# EAGLE board open-bldc-power-teardrops (EAGLE 5.06)
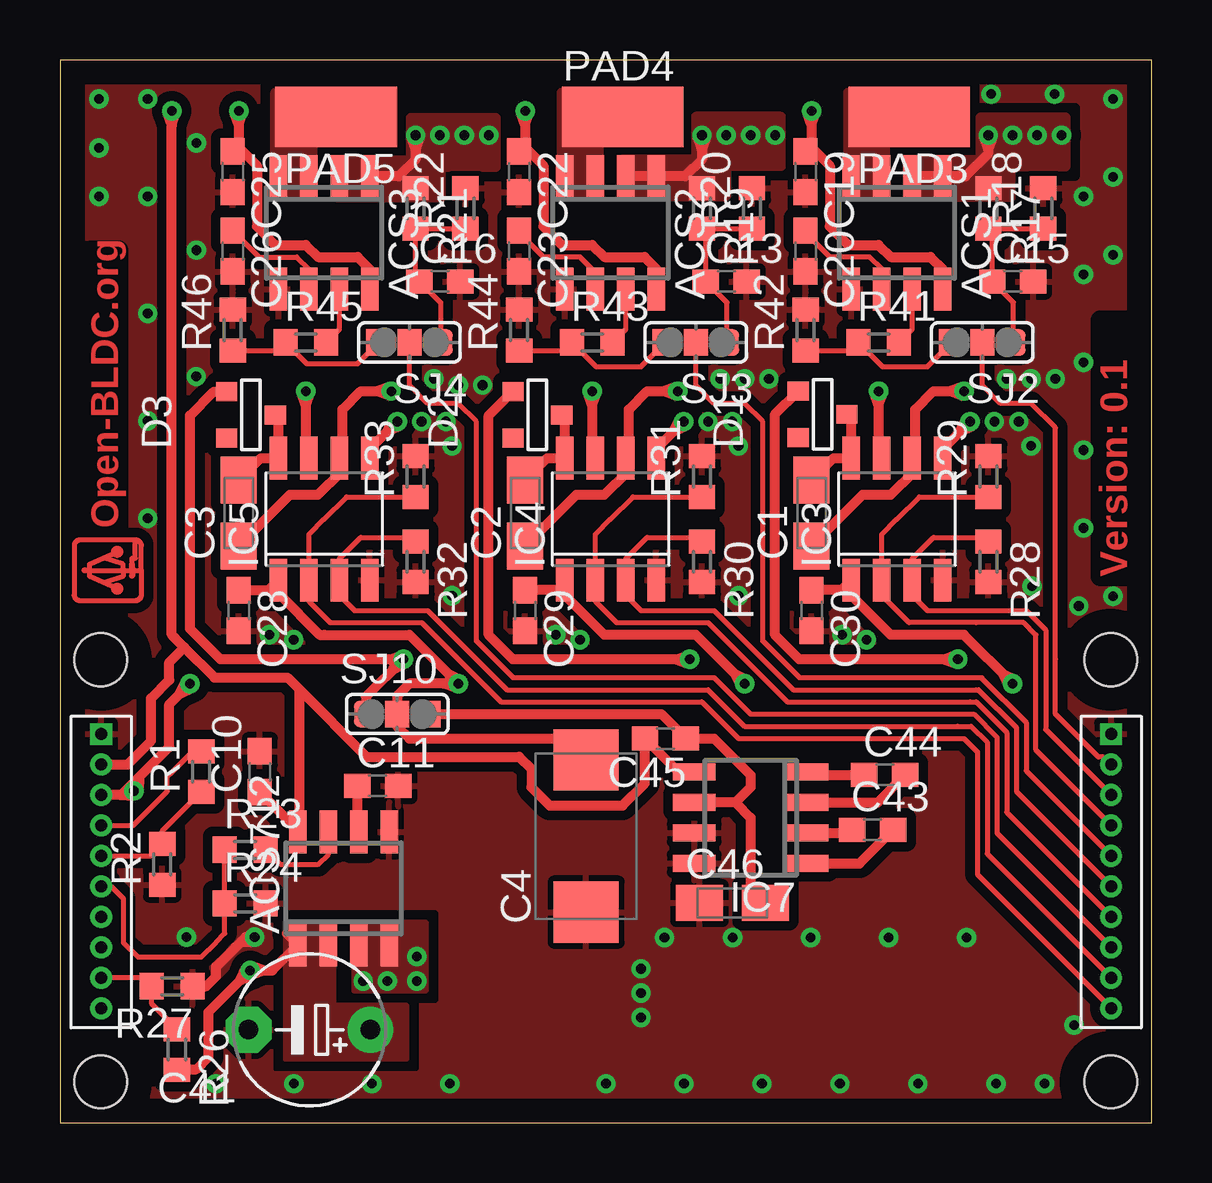
[diagram p0: board, top side]
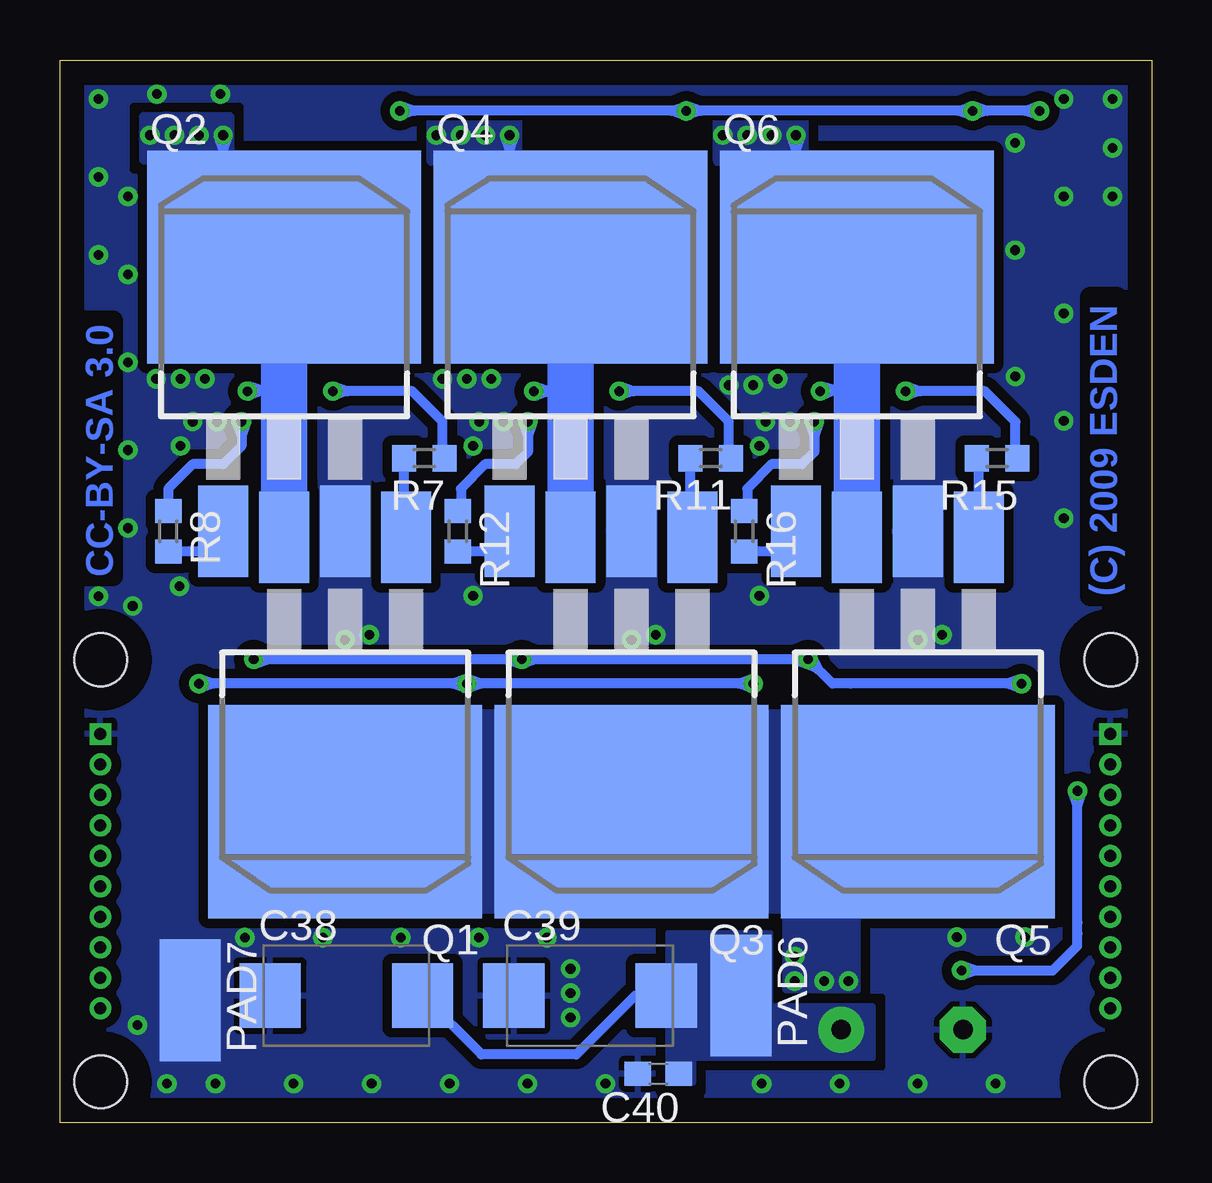
[diagram p1: board, bottom side, seen from below]

Size 45.5 x 44.3 mm. Coordinates in mm from the lower left corner, seen from the top.
Outline: 45.5,0 45.5,44.3 0,44.3 0,0 45.5,0
Copper layers (1*16): Top 0.035mm / dielectric 1.5mm / Bottom 0.035mm
Design rules "open-bldc *": minimum track width 8mil, minimum drill 0.4mm, track to track 8mil, track to pad 8mil, pad to pad 8mil, via to via 8mil, smd to smd 8mil, copper to edge 40mil, drill to drill 8mil, minimum pad ring 8mil, minimum via ring 8mil, stop-mask expansion 4mil, vias tented up to drill 0.4mm, thermal gap 10mil
Net classes: 0 default: width 0.152 mm, drill 0.305 mm, clearance 0.152 mm
Holes 2.2 mm at 43.8,1.7 1.7,1.7 1.7,19.3 43.8,19.3

## Footprints (pad centres in the part's own frame; a part is rotated, then mirrored left to right if it is on the bottom)
SO8 = smd 0.72 x 1.78: 1 -1.905,-2.35; 2 -0.635,-2.35; 3 0.635,-2.35; 4 1.905,-2.35; 5 1.905,2.35; 6 0.635,2.35; 7 -0.635,2.35; 8 -1.905,2.35
A/3216-18R = smd 1.95 x 1.5: + 1.375,0; - -1.375,0
D/7343-31R = smd 2.55 x 2.7: + 3.175,0; - -3.175,0
C0603 = smd 1.1 x 1: 1 -0.85,0; 2 0.85,0
E5-6 = drill 0.813 pad 1.905 round: + -2.54,0 | drill 0.813 pad 1.905 octagon: - 2.54,0
SOT-23 = smd 0.787 x 0.889: 1 0.025,-1.016; 2 -0.94,1.016; 3 0.991,1.016
SO-8 = smd 0.72 x 1.78: 1 -1.905,-2.543; 2 -0.635,-2.543; 3 0.635,-2.543; 4 1.905,-2.543; 5 1.905,2.543; 6 0.635,2.543; 7 -0.635,2.543; 8 -1.905,2.543
PIN_HDR_1.27MM_10 = drill 0.5 square: P$1 0,0 | drill 0.5 round: P$2 0,1.27; P$3 0,2.54; P$4 0,3.81; P$5 0,5.08; P$6 0,6.35; P$7 0,7.62; P$8 0,8.89; P$9 0,10.16; P$10 0,11.43
SMD2,54-5,08 = smd 2.54 x 5.08: 1 0,0
D2PACK = smd 2.083 x 3.81: 1 -2.54,-8.89; 3 2.54,-8.89 | smd 11.43 x 8.89: 2 0,2.54
R0603 = smd 1 x 1.1: 1 -0.85,0; 2 0.85,0
SJ2S = smd 1 x 1.1: 1 -1.3,0; 2 0,0; 3 1.3,0

## Placement (x,y rotation side)
ACS1  ACS712  [SO8]  34.89,37.1 180 top
ACS2  ACS712  [SO8]  22.95,37.1 180 top
ACS3  ACS712  [SO8]  11.01,37.1 180 top
ACS712  ACS712  [SO8]  11.82,9.77 0 top
C1  10µ  [A/3216-18R]  31.33,25.42 90 top
C2  10µ  [A/3216-18R]  19.39,25.42 90 top
C3  10µ  [A/3216-18R]  7.45,25.42 90 top
C4  100µ  [D/7343-31R]  21.93,11.95 90 top
C10  100n  [C0603]  8.33,14.63 90 top
C11  1n  [C0603]  13.25,14.04 0 top
C13  1n  [C0603]  27.77,35.07 0 top
C15  1n  [C0603]  39.71,35.07 0 top
C16  1n  [C0603]  15.84,35.07 0 top
C19  100n  [C0603]  31.08,39.64 270 top
C20  1n  [C0603]  31.08,36.34 270 top
C22  100n  [C0603]  19.14,39.64 270 top
C23  1n  [C0603]  19.14,36.34 270 top
C25  100n  [C0603]  7.2,39.64 270 top
C26  1n  [C0603]  7.2,36.34 270 top
C28  100n  [C0603]  7.45,21.35 270 top
C29  100n  [C0603]  19.39,21.35 270 top
C30  100n  [C0603]  31.33,21.35 270 top
C38  100µ  [D/7343-31R]  33.57,5.3 0 bottom
C39  100µ  [D/7343-31R]  23.41,5.3 0 bottom
C40  100n  [C0603]  20.56,2.05 180 bottom
C41  optional  [E5-6]  10.4,3.88 180 top
C43  22n  [C0603]  33.87,12.21 0 top
C44  22n  [C0603]  34.38,14.49 0 top
C45  22n  [C0603]  25.23,16.02 180 top
C46  4µ7  [A/3216-18R]  28.03,9.16 0 top
D1  BAS21  [SOT-23]  31.79,29.5 90 top
D2  BAS21  [SOT-23]  19.9,29.48 90 top
D3  BAS21  [SOT-23]  7.96,29.48 90 top
IC3  IR2101  [SO-8]  34.89,25.16 0 top
IC4  IR2101  [SO-8]  22.95,25.16 0 top
IC5  IR2101  [SO-8]  11.01,25.16 0 top
IC7  ST662A  [SO8]  28.79,12.72 90 top
JP21  PIN_HDR_1.27MM_10  [PIN_HDR_1.27MM_10]  43.82,16.2 180 top
JP22  PIN_HDR_1.27MM_10  [PIN_HDR_1.27MM_10]  1.72,16.2 180 top
PAD3  PHASE_A  [SMD2,54-5,08]  35.39,41.93 90 top
PAD4  PHASE_B  [SMD2,54-5,08]  23.46,41.93 270 top
PAD5  PHASE_C  [SMD2,54-5,08]  11.52,41.93 90 top
PAD6  BATT+  [SMD2,54-5,08]  17.11,5.3 180 bottom
PAD7  BATT-  [SMD2,54-5,08]  40.07,5.1 180 bottom
Q1  IRF3704S  [D2PACK]  33.62,15.51 180 bottom
Q2  IRF3704S  [D2PACK]  36.16,33.54 0 bottom
Q3  IRF3704S  [D2PACK]  21.68,15.51 180 bottom
Q4  IRF3704S  [D2PACK]  24.22,33.54 0 bottom
Q5  IRF3704S  [D2PACK]  9.74,15.51 180 bottom
Q6  IRF3704S  [D2PACK]  12.28,33.54 0 bottom
R1  NP  [R0603]  5.89,14.63 90 top
R2  0  [R0603]  4.27,10.77 90 top
R7  22  [R0603]  30.31,27.7 180 bottom
R8  22  [R0603]  40.98,24.65 270 bottom
R11  22  [R0603]  18.38,27.7 180 bottom
R12  22  [R0603]  28.92,24.65 270 bottom
R15  22  [R0603]  6.44,27.7 180 bottom
R16  R22  [R0603]  16.98,24.65 270 bottom
R17  10k  [R0603]  38.7,38.12 270 top
R18  3k6  [R0603]  40.98,38.12 90 top
R19  10k  [R0603]  26.76,38.12 270 top
R20  3k6  [R0603]  28.84,38.12 90 top
R21  10k  [R0603]  14.82,38.12 270 top
R22  3k6  [R0603]  16.9,38.12 90 top
R23  2k  [R0603]  7.72,11.38 0 top
R24  10k  [R0603]  7.72,9.14 0 top
R26  10k  [R0603]  4.88,3.05 270 top
R27  2k7  [R0603]  4.67,5.69 180 top
R28  10k  [R0603]  38.7,23.38 270 top
R29  10k  [R0603]  38.7,26.94 90 top
R30  10k  [R0603]  26.76,23.38 270 top
R31  10k  [R0603]  26.76,26.94 90 top
R32  10k  [R0603]  14.82,23.38 270 top
R33  10k  [R0603]  14.82,26.94 90 top
R41  2k  [R0603]  34.12,32.53 0 top
R42  10k  [R0603]  31.08,33.04 90 top
R43  2k  [R0603]  22.19,32.53 0 top
R44  10k  [R0603]  19.14,33.04 90 top
R45  2k  [R0603]  10.25,32.53 0 top
R46  10k  [R0603]  7.2,33.04 90 top
SJ2  SJ2S  [SJ2S]  38.44,32.53 180 top
SJ3  SJ2S  [SJ2S]  26.5,32.53 180 top
SJ4  SJ2S  [SJ2S]  14.57,32.53 180 top
SJ10  SJ2S  [SJ2S]  14.06,17.03 0 top

## Library data of the parts
ACS1-ACS3 ACS712 IC3-IC5 IC7 JP21 JP22 SJ2-SJ4 SJ10 = open-bldc
C1-C4 C10 C11 C13 C15 C16 C19 C20 C22 C23 C25 C26 C28-C30 C38-C41 C43-C46 R1 R2 R7 R8 R11 R12 R15-R24 R26-R33 R41-R46 = rcl
D1-D3 = zetex
PAD3-PAD7 = wirepad
Q1-Q6 = my-transistor-power

## Nets
+3V3: JP22.P$4 R1.2
+5V: ACS1.8 ACS2.8 ACS3.8 ACS712.8 C10.1 C19.1 C22.1 C25.1 C45.2 IC7.5 JP22.P$2
+12V: ACS712.1 ACS712.2 C38.+ C39.+ C40.1 C41.+ D1.3 D2.3 D3.3 JP22.P$3 PAD6.1 R26.2 SJ10.1
+12V_I_SENSE: ACS712.3 ACS712.4 Q1.2 Q3.2 Q5.2
BEMF_A: C15.1 R17.2 R18.1 SJ2.1
BEMF_B: C13.1 R19.2 R20.1 SJ3.1
BEMF_C: C16.1 R21.2 R22.1 SJ4.1
CTRL_A+: IC3.2 JP21.P$4 R29.1
CTRL_A-: IC3.3 JP21.P$3 R28.1
CTRL_B+: IC4.2 JP21.P$7 R31.1
CTRL_B-: IC4.3 JP21.P$6 R30.1
CTRL_C+: IC5.2 JP21.P$10 R33.1
CTRL_C-: IC5.3 JP21.P$9 R32.1
GND: ACS1.5 ACS2.5 ACS3.5 ACS712.5 C4.- C10.2 C11.2 C13.2 C15.2 C16.2 C19.2 C20.2 C22.2 C23.2 C25.2 C26.2 C28.2 C29.2 C30.2 C38.- C39.- C40.2 C41.- C46.- IC3.4 IC4.4 IC5.4 IC7.7 IC7.8 JP21.P$1 JP22.P$1 PAD7.1 Q2.3 Q4.3 Q6.3 R2.1 R18.2 R20.2 R22.2 R24.2 R27.1 R28.2 R29.2 R30.2 R31.2 R32.2 R33.2 R42.2 R44.2 R46.2
I/BEMF_A: JP21.P$2 SJ2.2
I/BEMF_B: JP21.P$5 SJ3.2
I/BEMF_C: JP21.P$8 SJ4.2
I_A: R41.1 R42.1 SJ2.3
I_B: R43.1 R44.1 SJ3.3
I_C: R45.1 R46.1 SJ4.3
I_PHASE_A: ACS1.3 ACS1.4 PAD3.1
I_PHASE_B: ACS2.3 ACS2.4 PAD4.1
I_PHASE_C: ACS3.3 ACS3.4 PAD5.1
I_SENSE: JP22.P$6 R23.1 R24.1
MOT_TEMP: JP22.P$8
N$1: IC4.7 R11.1
N$2: IC3.7 R7.1
N$6: ACS712.7 R23.2
N$7: IC3.5 R8.1
N$11: Q1.1 R7.2
N$12: C1.+ D1.1 IC3.8
N$13: IC4.5 R12.1
N$14: Q3.1 R11.2
N$15: Q5.1 R15.2
N$16: C2.+ D2.1 IC4.8
N$17: Q6.1 R16.2
N$18: IC5.7 R15.1
N$19: IC5.5 R16.1
N$21: C3.+ D3.1 IC5.8
N$23: ACS712.6 C11.1
N$24: C43.2 IC7.1
N$27: C44.2 IC7.3
N$29: C43.1 IC7.2
N$30: C44.1 IC7.4
N$31: ACS1.6 C20.1
N$32: ACS1.7 R41.2
N$34: ACS2.6 C23.1
N$35: ACS2.7 R43.2
N$37: ACS3.6 C26.1
N$38: ACS3.7 R45.2
N$43: Q2.1 R8.2
N$44: Q4.1 R12.2
NC: JP22.P$10
PHASE_A: ACS1.1 ACS1.2 C1.- IC3.6 Q1.3 Q2.2 R17.1
PHASE_B: ACS2.1 ACS2.2 C2.- IC4.6 Q3.3 Q4.2 R19.1
PHASE_C: ACS3.1 ACS3.2 C3.- IC5.6 Q5.3 Q6.2 R21.1
PS_ID: JP22.P$5 R1.1 R2.2
TEMP: JP22.P$7
V_BATT: JP22.P$9 R26.1 R27.2
VBD: C4.+ C28.1 C29.1 C30.1 IC3.1 IC4.1 IC5.1 SJ10.2
VBD_PUMP: C45.1 C46.+ IC7.6 SJ10.3

## Tracks (layer width: path | path; a pad name or v marks a point on that pad's centre or on a via)
+3V3
  Top 0.203: JP22.P$4 3.04,12.39 4.47,13.82 4.47,14.43 4.67,14.63 5.52,15.48 R1.2
+5V  (via drill 0.4)
  Top 0.406: ACS2.8 24.85,35.6 24.37,36.08 22.7,36.08 22.19,36.59 20.92,36.59 20.16,37.35 20.16,39.89 19.56,40.49 19.48,40.49 | ACS1.8 36.79,35.58 36.28,36.08 34.63,36.08 34.12,36.59 32.85,36.59 32.09,37.35 32.09,39.89 31.5,40.49 31.42,40.49 | ACS3.8 12.92,35.58 12.41,36.08 10.76,36.08 10.25,36.59 8.98,36.59 8.22,37.35 8.22,39.89 7.62,40.49 | v4.66,42.18 4.66,20.34 4.79,20.21 5.18,19.81 | 5.18,19.81 6.44,18.56 8.17,18.56 9.49,18.56 9.97,18.07 | 9.97,18.07 12.79,15.26 19.14,15.26 19.65,14.75 19.65,13.98 20.41,13.22 23.46,13.22 24.39,14.15 C45.2 25.78,14.62 IC7.5 | 31.42,40.49 C19.1 31.42,40.49 | 19.48,40.49 C22.1 19.48,40.49 | 19.48,40.49 19.39,40.58 v19.39,42.18 | 31.42,40.49 31.33,40.49 v31.33,42.18 | 7.62,40.49 C25.1 | 7.62,40.49 7.46,40.66 v7.46,42.18 | JP22.P$2 2.81,14.93 3.8,15.92 3.8,17.69 4.56,18.46 4.56,19.19 5.18,19.81 | 9.97,18.07 9.97,12.32 9.99,12.3 9.87,12.17 ACS712.8 9.92,12.19 C10.1 | v19.39,42.18 19.58,42.11 19.39,41.58 19.2,42.11 v19.39,42.18 | v7.46,42.18 7.64,42.11 7.46,41.58 7.27,42.11 v7.46,42.18 | v31.33,42.18 31.52,42.11 31.33,41.58 31.14,42.11 v31.33,42.18 | v4.66,42.18 4.85,42.11 4.66,41.58 4.47,42.11 v4.66,42.18
  Bottom 0.406: v7.46,42.18 v19.39,42.18 | v19.39,42.18 v31.33,42.18 | v4.66,42.18 v7.46,42.18 | v19.39,42.18 19.33,41.99 18.79,42.18 19.33,42.37 v19.39,42.18 | v19.39,42.18 19.46,42.37 19.99,42.18 19.46,41.99 v19.39,42.18 | v7.46,42.18 7.52,42.37 8.05,42.18 7.52,41.99 v7.46,42.18 | v7.46,42.18 7.39,41.99 6.86,42.18 7.39,42.37 v7.46,42.18 | v31.33,42.18 31.26,41.99 30.73,42.18 31.26,42.37 v31.33,42.18 | v4.66,42.18 4.73,42.37 5.26,42.18 4.73,41.99 v4.66,42.18
+12V  (via drill 0.4)
  Top 0.406: D1.3 29.81,29.53 29.81,20.34 30.82,19.32 v37.43,19.32 | v26.25,19.32 18.89,19.32 17.87,20.34 17.87,29.48 18.86,30.47 D2.3 | v14.31,19.32 6.69,19.32 5.42,20.59 5.42,29.48 6.41,30.47 D3.3 6.92,30.47 | SJ10.1 12.76,17.77 v14.31,19.32 | 2.56,13.66 JP22.P$3 | 2.56,13.66 4.56,15.66 4.56,17.44 v5.42,18.3 | 2.56,13.66 2.91,13.66 v3.09,13.83 | 9.46,7.87 ACS712.1 8.85,6.35 v7.92,6.35 | v7.92,6.35 6.2,4.62 6.2,2.74 5.69,2.23 4.91,2.23 R26.2 | v37.43,19.32 37.36,19.13 36.83,19.32 37.36,19.51 v37.43,19.32 | v26.25,19.32 26.18,19.13 25.65,19.32 26.18,19.51 v26.25,19.32 | v14.31,19.32 14.25,19.13 13.71,19.32 14.25,19.51 v14.31,19.32 | v14.31,19.32 14.4,19.14 13.89,18.89 14.13,19.41 v14.31,19.32 | v5.42,18.3 5.51,18.12 5,17.88 5.24,18.39 v5.42,18.3 | v3.09,13.83 3.08,13.63 2.51,13.66 2.97,13.99 v3.09,13.83 | v3.09,13.83 2.93,13.96 3.29,14.4 3.29,13.83 v3.09,13.83 | v7.92,6.35 8.01,6.17 7.5,5.93 7.74,6.44 v7.92,6.35 | v7.92,6.35 7.99,6.54 8.53,6.35 7.99,6.16 v7.92,6.35
  Bottom 0.406: v26.25,19.32 v37.43,19.32 | v14.31,19.32 v26.25,19.32 | v5.42,18.3 12.54,18.3 13.3,18.3 v14.31,19.32 | v3.09,13.83 3.09,8.35 3.09,7.89 3.1,7.87 3.1,7.37 4.12,6.35 v7.92,6.35 | C39.+ 21.52,5.3 23.98,2.85 27.94,2.85 C38.+ | v37.43,19.32 37.36,19.13 36.83,19.32 37.36,19.51 v37.43,19.32 | v26.25,19.32 26.32,19.51 26.85,19.32 26.32,19.13 v26.25,19.32 | v26.25,19.32 26.18,19.13 25.65,19.32 26.18,19.51 v26.25,19.32 | v14.31,19.32 14.38,19.51 14.91,19.32 14.38,19.13 v14.31,19.32 | v14.31,19.32 14.4,19.14 13.89,18.89 14.13,19.41 v14.31,19.32 | v5.42,18.3 5.49,18.49 6.02,18.3 5.49,18.11 v5.42,18.3 | v3.09,13.83 3.27,13.77 3.09,13.23 2.9,13.77 v3.09,13.83 | v7.92,6.35 7.86,6.16 7.33,6.35 7.86,6.54 v7.92,6.35
  pour Top (isolate 0.305, no thermals): 14.47,2.66 14.47,4.89 11.42,4.89 11.42,8.35 9.39,8.35 9.39,2.66
  pour Bottom (isolate 0.305, no thermals): 11.62,4.89 11.62,2.66 19.1,2.64 19.1,1.64 20.15,1.64 20.15,7.94 15.89,7.94 15.89,4.89
+12V_I_SENSE  (via drill 0.4)
  other vias: 12.64,5.91 13.65,5.91 14.87,5.91 14.87,6.92
  pour Bottom (no thermals): 4.41,8.91 38.95,8.91 38.95,17.03 4.41,17.03
  pour Top (isolate 0.305, no thermals): 12.23,8.35 12.23,5.5 15.28,5.5 15.28,8.35
  pour Bottom (isolate 0.305, no thermals): 12.23,9.57 12.23,5.5 15.28,5.5 15.28,9.57
BEMF_A
  Top 0.203: SJ2.1 39.74,34.19 C15.1 38.86,37.1 R17.2 R18.1
BEMF_B
  Top 0.203: SJ3.1 27.8,34.19 C13.1 26.93,37.1 R19.2 R20.1
BEMF_C
  Top 0.203: R22.1 R21.2 14.82,35.23 C16.1 15.87,34.19 SJ4.1
CTRL_A+
  Top 0.203: R29.1 35.81,26.09 34.89,25.16 34.25,24.53 IC3.2 34.25,21.99 35.4,20.84 38.19,20.84 40.17,20.84 40.68,20.34 40.68,15.53 JP21.P$4
CTRL_A-
  Top 0.203: R28.1 38.53,24.4 36.41,24.4 35.52,23.51 IC3.3 35.52,21.99 36.16,21.35 38.7,21.35 40.27,21.35 41.08,20.54 41.08,16.39 JP21.P$3
CTRL_B+
  Top 0.203: R31.1 23.88,26.09 22.95,25.16 22.31,24.53 IC4.2 22.31,21.73 23.2,20.84 27.01,20.84 30.32,17.54 37.94,17.54 38.19,17.54 39.46,16.27 39.46,12.94 JP21.P$7
CTRL_B-
  Top 0.203: R30.1 26.59,24.4 24.47,24.4 23.58,23.51 IC4.3 23.58,21.99 24.22,21.35 27.27,21.35 30.57,18.05 38.19,18.05 38.29,18.05 39.87,16.47 39.87,13.8 JP21.P$6
CTRL_C+
  Top 0.203: R33.1 11.94,26.09 11.01,25.16 10.38,24.53 IC5.2 10.38,21.73 11.27,20.84 15.07,20.84 18.38,17.54 26.76,17.54 28.28,16.02 36.92,16.02 37.68,16.02 38.24,15.46 38.24,10.35 JP21.P$10
CTRL_C-
  Top 0.203: R32.1 14.65,24.4 12.54,24.4 11.65,23.51 IC5.3 11.65,21.99 12.28,21.35 15.33,21.35 18.63,18.05 27.01,18.05 28.54,16.52 37.43,16.52 37.99,16.52 38.65,15.87 38.65,11.21 JP21.P$9
GND  (via drill 0.4)
  Top 0.406: R27.1 6.1,5.69 6.5,6.1 6.5,6.5 7.32,7.32 7.74,7.74 v8.12,7.74 | v8.12,7.74 8.11,7.54 7.55,7.55 7.99,7.89 v8.12,7.74
  other vias: 40.53,22.37 28.28,21.96 32.6,20.34 20.66,20.34 16.34,21.96 8.72,20.34 17.61,30.75 16.6,30.75 15.58,31 16.34,28.21 16.09,29.23 15.07,29.23 29.55,31 28.54,31 27.52,31 28.03,29.23 27.01,29.23 28.28,28.21 41.49,31 40.47,31 39.46,31 38.95,29.23 39.97,29.23 40.47,28.21 24.22,4.38 24.22,5.4 24.22,6.42 5.27,7.74 21.68,20.13 33.62,20.13 9.74,20.13 5.68,31.1 5.69,36.37 5.69,40.84 1.63,42.67 3.66,42.67 1.63,38.61 1.63,40.64 3.66,38.61 3.66,33.73 3.66,29.26 3.66,25.2 6.5,1.63 9.75,1.63 13,1.63 16.26,1.63 22.76,1.63 26.01,1.63 29.26,1.63 32.51,1.63 35.76,1.63 39.01,1.63 41.05,1.63 34.54,7.72 37.8,7.72 42.27,4.06 42.47,21.54 43.89,21.95 42.67,24.79 42.67,28.04 42.67,31.7 42.67,35.36 42.67,38.61 43.89,42.67 43.89,39.42 43.89,36.17 31.29,7.72 28.04,7.72 25.2,7.72 38.81,42.88 41.45,42.88
  pour Bottom (isolate 0.406, rank 2): 45.3,0.27 0.09,0.27 0.09,43.86 45.3,43.86
  pour Top (isolate 0.406, rank 2): 45.3,0.27 0.09,0.27 0.09,43.86 45.3,43.86
  pour Bottom (no thermals): 38.61,7.72 41.66,7.72 41.66,2.24 38.61,2.24
  pour Bottom (isolate 0.406, no thermals): 8.74,27.23 10.57,27.23 10.57,21.95 8.74,21.95
  pour Bottom (isolate 0.406, no thermals): 20.73,27.23 22.56,27.23 22.56,21.95 20.73,21.95
  pour Bottom (isolate 0.406, no thermals): 32.72,27.23 34.54,27.23 34.54,21.95 32.72,21.95
I/BEMF_A
  Top 0.203: SJ2.2 38.44,30.75 39.2,29.99 40.48,29.99 41.49,28.97 41.49,19.32 41.49,17.05 41.49,17.03 43.28,15.24 43.48,15.24 43.79,14.93 JP21.P$2
I/BEMF_B
  Top 0.203: 38.24,18.56 38.44,18.56 | 38.24,18.56 30.82,18.56 29.3,20.08 29.3,29.23 28.54,29.99 27.27,29.99 26.5,30.75 SJ3.2 | JP21.P$5 40.27,14.67 40.27,16.68 38.39,18.56 38.24,18.56
I/BEMF_C
  Top 0.203: SJ4.2 14.57,30.75 15.33,29.99 16.6,29.99 17.36,29.23 17.36,20.08 18.89,18.56 27.27,18.56 28.79,17.03 37.68,17.03 38.09,17.03 39.05,16.07 39.05,12.07 JP21.P$8
I_A
  Top 0.203: R42.1 32.93,32.19 R41.1 34.29,31.51 36.16,31.51 37.14,32.5 SJ2.3
I_B
  Top 0.203: R44.1 21,32.19 R43.1 22.35,31.51 24.22,31.51 25.2,32.5 SJ3.3
I_C
  Top 0.203: R46.1 9.06,32.19 R45.1 10.29,31.64 12.41,31.64 13.27,32.5 SJ4.3
I_PHASE_A
  pour Top (no thermals): 32.85,38.62 32.85,42.94 37.68,42.94 37.68,40.91 34.38,40.91 34.38,38.62
I_PHASE_B
  pour Top (no thermals): 20.92,38.62 20.92,42.94 25.74,42.94 25.74,40.91 22.44,40.91 22.44,38.62
I_PHASE_C
  pour Top (no thermals): 8.98,38.62 8.98,42.94 13.8,42.94 13.8,40.91 10.5,40.91 10.5,38.62
I_SENSE
  Top 0.203: JP22.P$6 2.14,9.85 2.64,9.35 2.64,7.52 3.25,6.91 5.89,6.91 6.5,7.52 6.87,7.89 R24.1 R23.1
LOGO
  Top 0.203: 3.39,23.03 3.39,22.01 arc-90 3.14,21.76 0.85,21.76 arc-90 0.6,22.01 0.6,24.04 arc-90 0.85,24.3 3.14,24.3 | 3.39,23.03 3.39,24.04 arc90 3.14,24.3 | 2.38,22.27 1.23,22.77 1.23,23.03 | 1.23,23.03 1.23,23.28 2.38,23.79 | 1.87,22.52 2.63,22.77 2.63,23.03 | 2.63,23.03 2.63,23.28 1.84,23.54 | 3.14,24.3 3.14,23.54 3.01,23.54 3.01,23.28 3.04,23.03 3.01,23.03 | 1.23,23.03 2.63,23.03 | 2.63,23.03 3.01,23.03 | 3.01,23.03 3.39,23.03 | 1.23,23.03 1.05,23.03
  Top 0.254: 3.01,23.28 3.01,23.03 3.01,22.8 | 1.05,23.03 1.03,23.03
  Top 0.508: 2.38,23.79 2.4,23.79 | 2.38,22.27 2.4,22.27
N$1  (via drill 0.4)
  Top 0.406: IC4.7 22.19,27.83 v22.19,30.5 | v22.19,30.5 22.38,30.43 22.19,29.89 22,30.43 v22.19,30.5
  Bottom 0.406: v22.19,30.5 18.89,30.5 17.61,29.23 17.61,27.79 R11.1 | v22.19,30.5 22.12,30.31 21.59,30.5 22.12,30.68 v22.19,30.5
N$2  (via drill 0.4)
  Top 0.406: IC3.7 34.12,27.83 v34.12,30.5 | v34.12,30.5 34.31,30.43 34.12,29.89 33.94,30.43 v34.12,30.5
  Bottom 0.406: v34.12,30.5 30.82,30.5 29.55,29.23 29.55,27.79 R7.1 | v34.12,30.5 34.06,30.31 33.52,30.5 34.06,30.68 v34.12,30.5
N$6
  Top 0.203: 11.38,12.31 ACS712.7 11.19,11.19 10.77,10.77 9.18,10.77 R23.2
N$7  (via drill 0.4)
  Top 0.406: IC3.5 36.79,28.08 v37.94,29.23 | v37.94,29.23 38.02,29.05 37.51,28.8 37.75,29.31 v37.94,29.23
  Bottom 0.406: v37.94,29.23 37.94,28.21 38.7,27.45 39.97,27.45 40.98,26.43 R8.1 | v37.94,29.23 38.12,29.16 37.94,28.62 37.75,29.16 v37.94,29.23
N$11
  Bottom 0.406: R7.2 31.16,24.49 Q1.1
N$12
  Top 0.406: D1.1 32.98,29.35 IC3.8 32.24,27.7 C1.+
N$13  (via drill 0.4)
  Top 0.406: IC4.5 24.85,28.08 v26,29.23 | v26,29.23 26.08,29.05 25.57,28.8 25.82,29.31 v26,29.23
  Bottom 0.406: v26,29.23 26,27.95 26.5,27.45 27.77,27.45 28.79,26.43 28.79,25.63 R12.1 | v26,29.23 26.18,29.16 26,28.62 25.81,29.16 v26,29.23
N$14
  Bottom 0.406: R11.2 19.23,24.49 Q3.1
N$15
  Bottom 0.406: Q5.1 7.2,27.61 R15.2
N$16
  Top 0.406: C2.+ 20.31,27.7 IC4.8 21.04,29.38 D2.1
N$17
  Bottom 0.406: R16.2 15.67,23.8 Q6.1
N$18  (via drill 0.4)
  Top 0.406: IC5.7 10.25,27.83 v10.25,30.5 | v10.25,30.5 10.44,30.43 10.25,29.89 10.06,30.43 v10.25,30.5
  Bottom 0.406: v10.25,30.5 6.95,30.5 5.68,29.23 5.68,27.79 R15.1 | v10.25,30.5 10.18,30.31 9.65,30.5 10.18,30.68 v10.25,30.5
N$19  (via drill 0.4)
  Top 0.406: IC5.5 12.92,28.08 v14.06,29.23 | v14.06,29.23 14.14,29.05 13.63,28.8 13.88,29.31 v14.06,29.23
  Bottom 0.406: v14.06,29.23 14.06,27.95 14.57,27.45 15.84,27.45 16.85,26.43 16.85,25.63 R16.1 | v14.06,29.23 14.25,29.16 14.06,28.62 13.87,29.16 v14.06,29.23
N$21
  Top 0.406: D3.1 9.11,29.38 IC5.8 8.37,27.7 C3.+
N$23
  Top 0.406: C11.1 12.4,12.18 ACS712.6
N$24
  Top 0.406: C43.2 33.32,10.81 IC7.1
N$27
  Top 0.406: C44.2 34.09,13.35 IC7.3
N$29
  Top 0.406: C43.1 32.89,12.08 IC7.2
N$30
  Top 0.406: C44.1 31.27,14.49 IC7.4
N$31
  Top 0.203: C20.1 31.08,37.1 32.09,36.08 33.74,36.08 34.25,35.58 ACS1.6
N$32
  Top 0.203: R41.2 35.52,33.07 ACS1.7
N$34
  Top 0.203: C23.1 19.14,37.1 20.16,36.08 21.68,36.08 22.19,35.58 22.19,34.88 ACS2.6
N$35
  Top 0.203: R43.2 23.58,33.07 ACS2.7
N$37
  Top 0.203: C26.1 8.3,36.08 9.87,36.08 10.38,35.58 ACS3.6
N$38
  Top 0.203: ACS3.7 11.65,33.07 R45.2
N$43
  Bottom 0.406: R8.2 39.55,23.8 Q2.1
N$44
  Bottom 0.406: R12.2 27.61,23.8 Q4.1
PHASE_A  (via drill 0.4)
  Top 0.406: C1.- 33.47,26.18 34.63,26.18 | 34.63,26.18 35.52,27.07 IC3.6 | ACS1.2 37.74,39.45 38.7,40.4 v38.7,41.16 | 34.63,26.18 35.65,27.19 35.65,29.73 36.41,30.5 v37.68,30.5 | v38.7,41.16 38.88,41.1 38.7,40.56 38.51,41.1 v38.7,41.16 | v37.68,30.5 37.61,30.31 37.08,30.5 37.61,30.68 v37.68,30.5
  Bottom 0.406: v38.7,41.16 38.7,39.89 36.92,38.12 36.16,37.35 Q2.2 | v37.68,30.5 37.66,30.52 36.16,30.52 | v38.7,41.16 38.88,41.1 38.7,40.56 38.51,41.1 v38.7,41.16 | v37.68,30.5 37.61,30.31 37.08,30.52 37.62,30.69 v37.68,30.5
  Bottom 1.93: Q1.3 36.16,30.52 Q2.2
  other vias: 39.71,41.16 40.73,41.16 41.74,41.16
  pour Top (no thermals): 35.32,38.6 39.64,38.6 39.64,39.87 41.92,39.87 41.92,41.9 38.37,41.9 38.37,40.12 35.32,40.12
  pour Bottom (no thermals): 38.44,41.93 38.44,40.15 42,40.15 42,41.93
PHASE_B  (via drill 0.4)
  Top 0.406: C2.- 21.53,26.18 22.7,26.18 | 22.7,26.18 23.58,27.07 IC4.6 | ACS2.2 26.06,39.45 26.76,40.15 v26.76,41.16 | 22.7,26.18 23.71,27.19 23.71,29.73 24.47,30.5 v25.74,30.5 | v26.76,41.16 26.95,41.1 26.76,40.56 26.57,41.1 v26.76,41.16 | v25.74,30.5 25.68,30.31 25.14,30.5 25.68,30.68 v25.74,30.5
  Bottom 0.406: v26.76,41.16 26.76,40.4 24.98,38.62 24.22,37.86 Q4.2 | v25.74,30.5 24.22,30.5 | v26.76,41.16 26.95,41.1 26.76,40.56 26.57,41.1 v26.76,41.16 | v25.74,30.5 25.68,30.31 25.14,30.5 25.68,30.68 v25.74,30.5
  Bottom 1.93: Q3.3 24.22,30.5 Q4.2
  other vias: 27.77,41.16 28.79,41.16 29.81,41.16
  pour Top (no thermals): 23.46,38.62 27.77,38.62 27.77,39.89 30.06,39.89 30.06,41.93 26.5,41.93 26.5,40.15 23.46,40.15
  pour Bottom (no thermals): 26.45,41.85 26.45,40.07 30.01,40.07 30.01,41.85
PHASE_C  (via drill 0.4)
  Top 0.406: C3.- 9.59,26.18 10.76,26.18 | 10.76,26.18 11.65,27.07 IC5.6 | 10.76,26.18 11.77,27.19 11.77,29.73 12.54,30.5 v13.8,30.5 | ACS3.1 14.12,39.45 14.82,40.15 v14.82,41.16 | v13.8,30.5 13.74,30.31 13.21,30.5 13.74,30.68 v13.8,30.5 | v14.82,41.16 15.01,41.1 14.82,40.56 14.63,41.1 v14.82,41.16
  Bottom 0.406: v13.8,30.5 13.75,30.55 12.28,30.55 | v14.82,41.16 14.82,40.4 13.3,38.88 12.28,37.86 Q6.2 | v13.8,30.5 13.72,30.31 13.21,30.55 13.75,30.69 v13.8,30.5 | v14.82,41.16 15.01,41.1 14.82,40.56 14.63,41.1 v14.82,41.16
  Bottom 1.93: Q5.3 12.28,30.55 Q6.2
  other vias: 15.84,41.16 16.85,41.16 17.87,41.16
  pour Top (no thermals): 11.57,38.57 15.89,38.57 15.89,39.84 18.17,39.84 18.17,41.87 14.62,41.87 14.62,40.1 11.57,40.1
  pour Bottom (no thermals): 14.52,41.85 14.52,40.07 18.07,40.07 18.07,41.85
PS_ID
  Top 0.203: R1.1 4.27,12.15 R2.2 3.77,11.12 JP22.P$5
V_BATT
  Top 0.203: R26.1 3.82,4.95 R27.2 3.47,6.04 JP22.P$9
VBD  (via drill 0.4)
  Top 0.406: C29.1 20.63,22.2 arc90 IC4.1 21.04,21.99 22.7,20.34 26.5,20.34 v28.54,18.3 | C28.1 8.69,22.2 IC5.1 9.11,22.06 10.83,20.34 11.01,20.34 14.57,20.34 v16.6,18.3 | C30.1 32.56,22.2 IC3.1 32.98,21.99 34.63,20.34 37.68,20.34 v39.71,18.3 | v16.6,18.3 14.57,18.3 14.06,17.8 SJ10.2 14.06,16.52 14.57,16.02 21.04,16.02 C4.+ | v39.71,18.3 39.53,18.22 39.29,18.73 39.8,18.48 v39.71,18.3 | v28.54,18.3 28.36,18.22 28.11,18.73 28.62,18.48 v28.54,18.3 | v16.6,18.3 16.42,18.22 16.18,18.73 16.68,18.48 v16.6,18.3 | v16.6,18.3 16.53,18.11 16,18.3 16.53,18.49 v16.6,18.3
  Bottom 0.406: v28.54,18.3 v39.71,18.3 | v16.6,18.3 v28.54,18.3 | v39.71,18.3 39.65,18.11 39.11,18.3 39.65,18.49 v39.71,18.3 | v28.54,18.3 28.6,18.49 29.14,18.3 28.6,18.11 v28.54,18.3 | v28.54,18.3 28.47,18.11 27.94,18.3 28.47,18.49 v28.54,18.3 | v16.6,18.3 16.67,18.49 17.2,18.3 16.67,18.11 v16.6,18.3
VBD_PUMP
  Top 0.406: C46.+ 28.79,9.77 28.79,12.71 28.16,13.35 | 28.16,13.35 IC7.6 28.16,13.35 | 28.16,13.35 28.79,13.98 28.79,14.49 27.27,16.02 C45.1 25.07,17.03 24.05,17.03 16.6,17.03 SJ10.3

## Text on the board
Top: Open-BLDC.org | Version: 0.1
Bottom: CC-BY-SA 3.0 | (C) 2009 ESDEN
tStop: Open-BLDC.org | Version: 0.1
bStop: CC-BY-SA 3.0 | (C) 2009 ESDEN